# Altium PCB Dev_BRD_STM32F030K6T6.PcbDoc
Units mm, origin at the board's own origin, x right, y up, seen from the top; angles counter-clockwise.
Board outline 27 x 24 mm, 2 copper layers (Top Layer, Bottom Layer); 49 components, 33 nets, 100 pads, 43 vias.
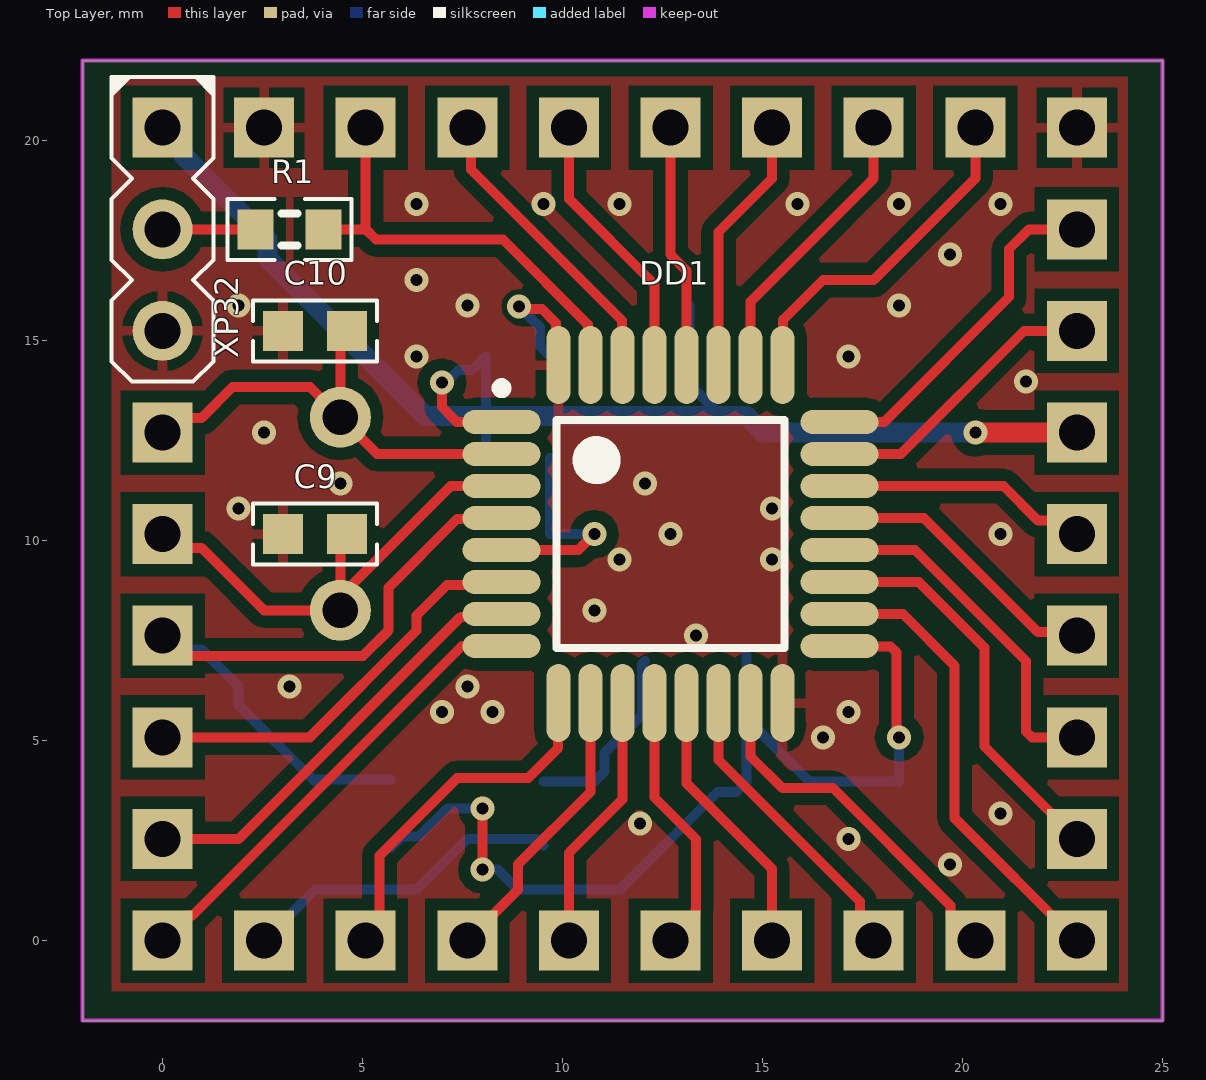
[diagram p0: Top Layer view]
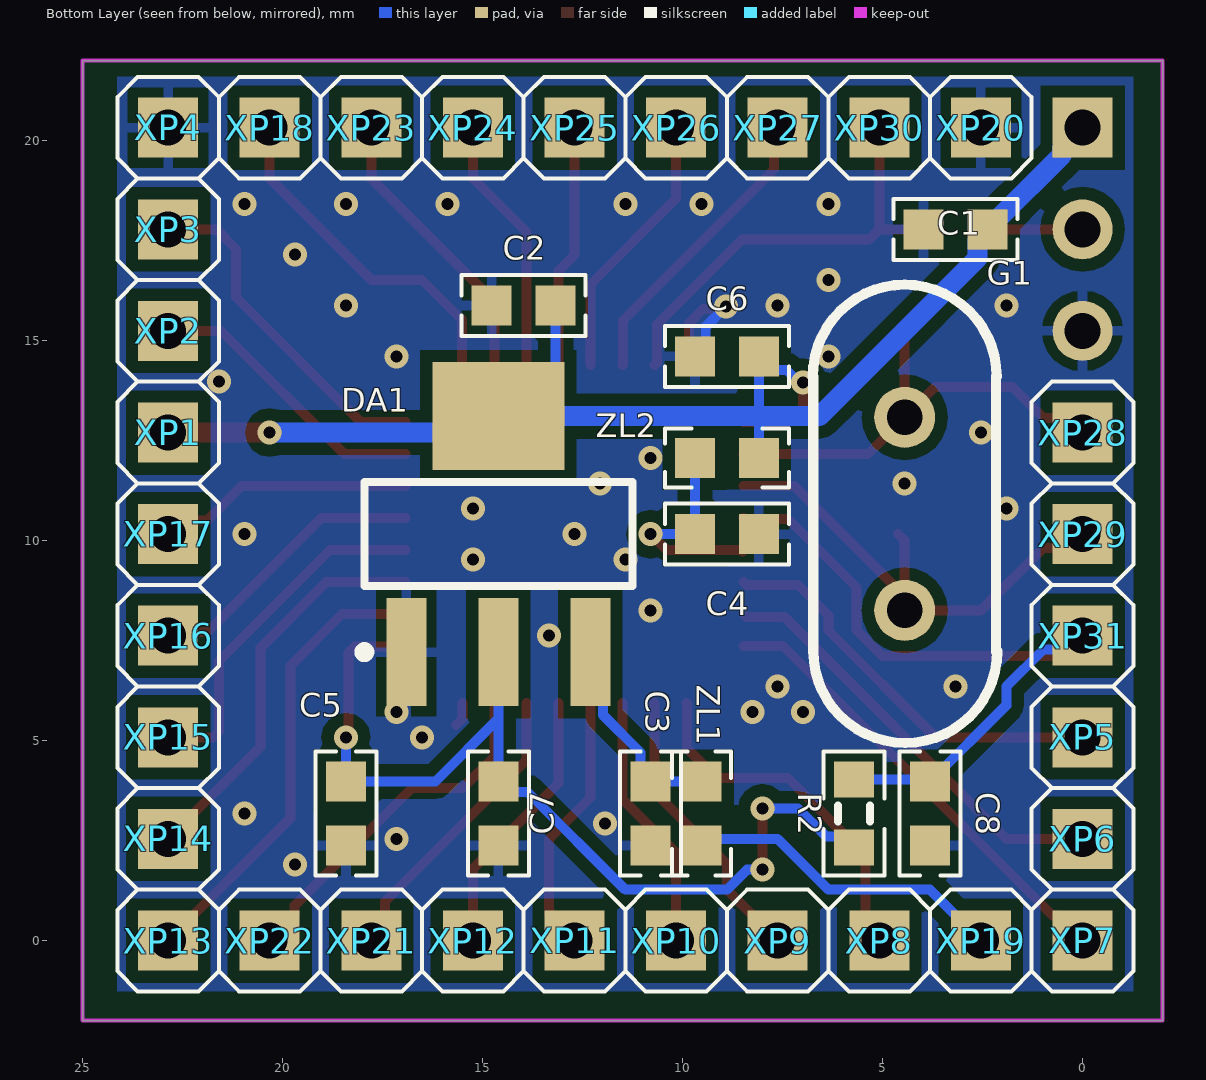
[diagram p1: Bottom Layer view, seen from below]

## Layer stack, top to bottom
Top Solder: solder mask 0.0102, Solder Resist, Dk 3.5
Top Layer: signal copper 0.0356
Dielectric 1: dielectric 0.32, FR-4, Dk 4.8
Bottom Layer: signal copper 0.0356
Bottom Solder: solder mask 0.0102, Solder Resist, Dk 3.5

## Board outline
-2,-2 -2,22 25,22 25,-2

## Design rules (kind name [scope] priority, off if disabled: settings)
Clearance Clearance_1 [InPoly] p1: gap=0.3 ignorepadtopadclearanceinfootprint=TRUE except(0: Arc-Hole Track-Hole SMDPad-Hole THPad-Hole Via-Hole Fill-Hole Poly-Hole Region-Hole Text-Hole)
Clearance [All] p2: gap=0.2 ignorepadtopadclearanceinfootprint=TRUE except(0: Arc-Hole Track-Hole SMDPad-Hole THPad-Hole Via-Hole Fill-Hole Poly-Hole Region-Hole Text-Hole)
PolygonConnect [All] p1: thpad.connectstyle=Relief thpad.reliefconductorwidth=0.254 thpad.reliefentries=4 thpad.polygonreliefangle="90 Angle" thpad.airgapwidth=0.254 smdpad.connectstyle=Relief smdpad.reliefconductorwidth=0.254 smdpad.reliefentries=4 smdpad.polygonreliefangle="90 Angle" smdpad.airgapwidth=0.254 via.connectstyle=Direct via.reliefconductorwidth=0.254 via.reliefentries=4 via.polygonreliefangle="90 Angle" via.airgapwidth=0.254
RoutingVias [All] p1: holewidth=0.5 width=0.8 viastyle="Through Hole" minholewidth=0.3 minwidth=0.6 maxholewidth=0.8 maxwidth=1.2
SolderMaskExpansion [All] p1: expansion=0.102 istentingtop=FALSE
Width [All] p1: maxlimit=0.5 minlimit=0.15 preferedwidth=0.25
30 further rules are at their usual default settings.

## Components (designator, comment, footprint, x,y, rotation, side; value= is the part's Value field where it differs from the comment)
C1 "100n" CAPC1608(0603)N 3.175,17.78 r0 bottom
C2 "10u" CAPC1608(0603)N 13.97,15.875 r180 bottom
C3 "10u" CAPC1608(0603)N 10.795,3.175 r90 bottom
C4 "100n" CAPC1608(0603)N 8.89,10.16 r0 bottom
C5 "100n" CAPC1608(0603)N 18.415,3.175 r90 bottom
C6 "100n" CAPC1608(0603)N 8.89,14.605 r180 bottom
C7 "10u" CAPC1608(0603)N 14.605,3.175 r90 bottom
C8 "100n" CAPC1608(0603)N 3.81,3.175 r90 bottom
C9 "12p" CAPC1608(0603)N 3.81,10.16 r0 top
C10 "12p" CAPC1608(0603)N 3.81,15.24 r0 top
DA1 "LD1117S33T" SOT223_M 14.605,10.16 r90 bottom
DD1 "STM32F030K6T6" STM-LQFP32_M 12.7,10.16 r0 top
G1 "8MHz" HC-49/S 4.445,8.255 r90 bottom
R1 "100k" RESC1608(0603)N 3.175,17.78 r180 top
R2 "10k" RESC1608(0603)N 5.715,3.175 r270 bottom
XP1 "PLS-1" PLS-1-3D 22.86,12.7 r90 bottom
XP2 "PLS-1" PLS-1-3D 22.86,15.24 r90 bottom
XP3 "PLS-1" PLS-1-3D 22.86,17.78 r90 bottom
XP4 "PLS-1" PLS-1-3D 22.86,20.32 r90 bottom
XP5 "PLS-1" PLS-1-3D 0,5.08 r180 bottom
XP6 "PLS-1" PLS-1-3D 0,2.54 r180 bottom
XP7 "PLS-1" PLS-1-3D 0,0 r180 bottom
XP8 "PLS-1" PLS-1-3D 5.08,0 r180 bottom
XP9 "PLS-1" PLS-1-3D 7.62,0 r180 bottom
XP10 "PLS-1" PLS-1-3D 10.16,0 r180 bottom
XP11 "PLS-1" PLS-1-3D 12.7,0 r180 bottom
XP12 "PLS-1" PLS-1-3D 15.24,0 r180 bottom
XP13 "PLS-1" PLS-1-3D 22.86,0 r180 bottom
XP14 "PLS-1" PLS-1-3D 22.86,2.54 r180 bottom
XP15 "PLS-1" PLS-1-3D 22.86,5.08 r180 bottom
XP16 "PLS-1" PLS-1-3D 22.86,7.62 r180 bottom
XP17 "PLS-1" PLS-1-3D 22.86,10.16 r180 bottom
XP18 "PLS-1" PLS-1-3D 20.32,20.32 r180 bottom
XP19 "PLS-1" PLS-1-3D 2.54,0 r90 bottom
XP20 "PLS-1" PLS-1-3D 2.54,20.32 r180 bottom
XP21 "PLS-1" PLS-1-3D 17.78,0 r180 bottom
XP22 "PLS-1" PLS-1-3D 20.32,0 r180 bottom
XP23 "PLS-1" PLS-1-3D 17.78,20.32 r180 bottom
XP24 "PLS-1" PLS-1-3D 15.24,20.32 r180 bottom
XP25 "PLS-1" PLS-1-3D 12.7,20.32 r180 bottom
XP26 "PLS-1" PLS-1-3D 10.16,20.32 r90 bottom
XP27 "PLS-1" PLS-1-3D 7.62,20.32 r180 bottom
XP28 "PLS-1" PLS-1-3D 0,12.7 r90 bottom
XP29 "PLS-1" PLS-1-3D 0,10.16 r90 bottom
XP30 "PLS-1" PLS-1-3D 5.08,20.32 r90 bottom
XP31 "PLS-1" PLS-1-3D 0,7.62 r90 bottom
XP32 "PLS-3" PLS-3-3D 0,20.32 r270 top
ZL1 "100u" INDC1608(0603)N 9.525,3.175 r90 bottom
ZL2 "100u" INDC1608(0603)N 8.89,12.065 r0 bottom

## Footprints (in the part's own frame and the unit in brackets; to place one, negate y for a bottom-side part, rotate by r counter-clockwise, add the part's x,y. Pads: shape width x height; smd on the part's side, far side on the other; paste and mask are expansions set on the pad)
CAPC1608(0603)N [mm] "Chip Capacitor, Body 1.6x0.8mm, IPC Medium Density"
  rect 1x1 smd: 1(-0.8,0) 2(0.8,0)
  silkscreen extent -1.55,-0.76 1.55,0.76, body extent -0.8,-0.4 0.8,0.4, height 0.3
HC-49/S [mil]
  round 60 hole 35: 1(0,0) 2(190,0)
  silkscreen extent -131,-91 321,91, body extent -128,-92 318,92, height 142
INDC1608(0603)N [mm] "Chip Inductor, Body 1.6x0.8mm, IPC Medium Density"
  rect 1x1 smd: 1(-0.8,0) 2(0.8,0)
  silkscreen extent -1.55,-0.74 1.55,0.74, body extent -0.87,-0.48 0.87,0.48, height 0.71
PLS-1-3D [mm] "Connector; Header; 1 Position"
  rect 1.5x1.5 hole 0.9: 1(0,0)
  silkscreen extent -1.27,-1.27 1.27,1.27, body extent -1.27,-1.27 1.27,1.27, height 8.44
PLS-3-3D [mm] "Connector; Header; 3 Position"
  rect 1.5x1.5 hole 0.9: 1(0,0)
  round 1.5 hole 0.9: 2(2.54,0) 3(5.08,0)
  silkscreen extent -1.27,-1.27 6.35,1.27, body extent -1.27,-1.27 6.35,1.27, height 8.44
RESC1608(0603)N [mm] "Chip Resistor, Body 1.6x0.8mm, IPC Medium Density"
  rect 0.9x1 smd: 1(-0.85,0) 2(0.85,0)
  silkscreen extent -1.55,-0.76 1.55,0.76, body extent -0.8,-0.4 0.8,0.4, height 0.3
SOT223_M [mm] "SOT223, 4-Leads, Body 6.5x3.5mm, Pitch 2.3mm, Lead Span 7mm, IPC Low Density"
  rect 2.7x1 smd: 1(-2.95,2.3) 2(-2.95,0) 3(-2.95,-2.3)
  rect 2.7x3.3 smd: 4(2.95,0)
  silkscreen extent -3.07,-3.35 1.3,3.48, body extent -3.65,-3.35 3.65,3.35, height 1.7
STM-LQFP32_M [mm] "QFP, 32-Leads, Body 7x7mm, Pitch 0.8mm, IPC Low Density"
  oval 1.95x0.6 smd: 1(-4.225,2.8) 2(-4.225,2) 3(-4.225,1.2) 4(-4.225,0.4) 5(-4.225,-0.4) 6(-4.225,-1.2) 7(-4.225,-2) 8(-4.225,-2.8) 17(4.225,-2.8) 18(4.225,-2) 19(4.225,-1.2) 20(4.225,-0.4) 21(4.225,0.4) 22(4.225,1.2) 23(4.225,2) 24(4.225,2.8)
  oval 0.6x1.95 smd: 9(-2.8,-4.225) 10(-2,-4.225) 11(-1.2,-4.225) 12(-0.4,-4.225) 13(0.4,-4.225) 14(1.2,-4.225) 15(2,-4.225) 16(2.8,-4.225) 25(2.8,4.225) 26(2,4.225) 27(1.2,4.225) 28(0.4,4.225) 29(-0.4,4.225) 30(-1.2,4.225) 31(-2,4.225) 32(-2.8,4.225)
  silkscreen extent -4.35,-2.85 2.85,3.77, body extent -3.5,-3.5 3.5,3.5, height 1.6

## Part data
C1 C2 C3 C4 C5 C6 C7 C8 C9 C10: library part CAPC1608(0603), "?", Digi-Key Part Number=?, HelpURL=?, Manufacturer Part Number=?, Note=?, Package=?, Part Number=CAPC1608(0603), Price$=?
DA1: "LDO Voltage Regulators 3.3V 0.8A Positive", Digi-Key Part Number=?, HelpURL=http://www.mouser.com/ds/2/389/CD00000544-310772.pdf, Manufacturer Part Number=?, Note=?, Package=?, Part Number=LD1117S33T, Price$=?
DD1: "ARM Microcontrollers - MCU Entry-level ARM Cortex-M0 Value MCU", I/Os (High Current)=26, Mouser Part Number=511-STM32F030K6T6, Operating Frequency(F) (Processor speed) (MHz)=48, Package=LQFP-32, Supplier Part Number 1=497-14046-ND, Supply Voltage(Vcc) min (V)=2.4, ComponentLink1Description="Manufacturer URL", ComponentLink1URL=http://www.st.com/web/en/home.html, ComponentLink2Description=Datasheet, ComponentLink2URL=http://www.st.com/st-web-ui/static/active/en/resource/technical/document/datasheet/DM00088500.pdf, ComponentLink3Description="Package Specification", ComponentLink3URL=http://www.st.com/st-web-ui/static/active/en/resource/technical/document/datasheet/DM00088500.pdf, Core="ARM Cortex-M0", DatasheetVersion="Rev. 1", FLASH Size (Prog) (kB)=32, HelpURL=https://eu.mouser.com/ProductDetail/STMicroelectronics/STM32F030K6T6?qs=eyrSuY1LhL2nYlb0JDdrAA%3D%3D, Internal RAM Size (kB)=4, Manufacturer Part Number=STM32F030K6T6, Mounting Technology="Surface Mount", PackageDescription="32-Pin Low Profile Quad Flat Package, 7 x 7 mm Body, 0.8 mm Pitch", PackageReference=LQFP32, PackageVersion="Rev. 1, 07/2013", Packing=Tray, Part Number=STM32F030K6T6, PartNumber=STM32F030K6T6, Price$=https://eu.mouser.com/ProductDetail/STMicroelectronics/STM32F030K6T6?qs=eyrSuY1LhL2nYlb0JDdrAA%3D%3D, Supplier 1=Digi-Key, Supplier 2=Newark, Supplier 3=Mouser, Supplier Part Number 2=19X6194, Supplier Part Number 3=511-STM32F030K6T6
G1: library part "Crystal HC-49/S", "Crystal HC-49/S", Part Number="Crystal HC-49/S"
R1 R2: library part RESC1608(0603), Digi-Key Part Number=???, HelpURL=???, Manufacturer Part Number=???, Note=???, Package=???, Part Number=RESC1608(0603), Price$=???
XP1 XP2 XP3 XP4 XP5 XP6 XP7 XP8 XP9 XP10 XP11 XP12 XP13 XP14 XP15 XP16 XP17 XP18 XP19 XP20 XP21 XP22 XP23 XP24 XP25 XP26 XP27 XP28 XP29 XP30 XP31: "CONN HEADER VERT 1POS", Digi-Key Part Number=S1011EC-01-ND, Manufacturer Part Number=PRPC001SAAN-RC, HelpURL=https://www.digikey.com/product-detail/en/sullins-connector-solutions/PRPC001SAAN-RC/S1011EC-01-ND/2775253, Note=???, Part Number=PLS-1, Price$=0.05
XP32: library part PR20203VBNN, "CONN HEADER VERT 3POS 2.54MM", Digi-Key Part Number=1849-1003-ND, Package="Header 3POS 2.54mm", HelpURL=https://www.digikey.com/product-detail/en/metz-connect-usa-inc/PR20203VBNN/1849-1003-ND/7794768, Manufacturer Part Number=PR20203VBNN, Part Number=PR20203VBNN
ZL1 ZL2: library part Ferite1608(0603), "ferite bead", Digi-Key Part Number=???, Manufacturer Part Number=???, Note=???, Package=???, Part Number=Ferite1608(0603), Price$=???

## Via types
v1: diameter 0.6, hole 0.3, Top Layer to Bottom Layer, tented both sides, 43 vias

## Nets (pads, with @x,y where several pads share a name; then routed paths per layer and width w, separated by ;. In a path a pad name is that pad's centre, name@x,y a point inside that pad or via, vN(x,y) a via of type N, cw(c..) or ccw(c..) an arc to the next point about the centre after c; other vN are vias at no path point)
+3.3V: C1.1 C2.2 C5.2 C6.2 C7.2 DA1.2 DA1.4 DD1.1 DD1.17 R2.2 XP1.1 XP32.1 ZL2.1 | length 60.2
  Top Layer w0.25: v1(6.985,13.947) 6.985,13.335 7.353,12.967 8.468,12.967 DD1.1 ; v1(8.001,1.778) v1(8.001,3.302) ; DD1.17 16.932,7.353 18.202,7.353 18.348,7.206 18.348,5.147 v1(18.415,5.08)
  Top Layer w0.5: v1(20.32,12.7) XP1.1
  Bottom Layer w0.25: XP32.1 XP32.1@0.509,19.811 ; C1.1@2.125,18.03 C1.1 ; R2.2 5.995,2.605 6.415,2.605 7.112,3.302 v1(8.001,3.302) ; v1(6.985,13.947) 7.08,13.947 7.399,14.266 7.751,14.266 C6.2 8.09,13.11 ZL2.1 ; v1(8.001,1.778) 8.382,1.778 8.89,1.27 11.43,1.27 13.876,3.716 14.346,3.716 C7.2 14.605,5.544 ; C2.2 13.17,13.91 DA1.4@13.97,13.11 ; DA1.2 14.605,5.544 ; v1(18.415,5.08) C5.2 16.174,3.975 14.605,5.544
  Bottom Layer w0.5: XP32.1@0.509,19.811 0.509,19.646 C1.1@2.125,18.03 ; C1.1 2.625,17.53 2.625,17.06 6.575,13.11 8.09,13.11 13.97,13.11 DA1.4 15.015,12.7 v1(20.32,12.7)
+5V: XP19.1 ZL1.1 | length 8.1
  Bottom Layer w0.25: XP19.1 3.81,1.27 6.35,1.27 7.62,2.54 9.36,2.54 ZL1.1
BOOT0: DD1.31 R1.1 XP30.1 | length 11.2
  Top Layer w0.25: R1.1 5.08,17.78 ; XP30.1 5.08,17.78 ; DD1.31 10.633,14.452 10.633,15.402 8.509,17.526 5.334,17.526 5.08,17.78
GND: C1.2 C2.1 C3.1 C4.1 C5.1 C6.1 C7.1 C8.1 C9.1 C10.1 DA1.1 DD1.16 DD1.32 XP4.1 XP20.1 XP32.3 | length 4.4
  Top Layer w0.25: v1(8.912,15.853) 8.979,15.786 9.487,15.786 9.833,15.44 9.833,14.452 DD1.32 ; DD1.16 15.5,5.547 DD1.16@15.662,5.385
  Bottom Layer w0.25: v1(8.912,15.853) 9.431,15.334 9.431,14.864 C6.1
  other v1: 19.685,1.905 17.145,2.54 11.938,2.921 20.955,3.175 16.51,5.08 6.985,5.715 8.255,5.715 17.145,5.715 3.175,6.35 7.62,6.35 13.335,7.62 10.795,8.255 11.43,9.525 15.24,9.525 12.7,10.16 20.955,10.16 1.905,10.795 15.24,10.795 4.445,11.43 12.065,11.43 10.795,12.065 2.54,12.7 21.59,13.97 6.35,14.605 17.145,14.605 1.905,15.875 7.62,15.875 18.415,15.875 6.35,16.51 19.685,17.145 6.35,18.415 9.525,18.415 11.43,18.415 15.875,18.415 18.415,18.415 20.955,18.415
NetC3_2: C3.2 DA1.3 ZL1.2 | length 4.8
  Bottom Layer w0.25: ZL1.2 C3.2 11.054,4.234 11.054,4.704 11.992,5.642 11.992,6.912 DA1.3@12.065,6.985
NetC4_2: C4.2 DD1.5 ZL2.2 | length 5.5
  Top Layer w0.25: DD1.5@8.505,9.73 DD1.5 10.395,9.76 v1(10.795,10.16)
  Bottom Layer w0.25: ZL2.2 C4.2 v1(10.795,10.16)
NetC9_2: C9.2 DD1.3 G1.1 XP29.1 | length 12.3
  Top Layer w0.25: XP29.1 0.344,9.816 0.979,9.816 2.54,8.255 G1.1 4.445,8.516 G1.1@4.445,8.68 ; C9.2 4.445,9.995 G1.1@4.445,8.68 ; DD1.3 7.205,11.36 4.525,8.68 G1.1@4.445,8.68
NetC10_2: C10.2 DD1.2 G1.2 XP28.1 | length 11.9
  Top Layer w0.25: XP28.1 0.366,13.066 0.979,13.066 1.751,13.838 3.688,13.838 G1.2 ; C10.2 4.445,15.075 G1.2 ; DD1.2 5.366,12.16 G1.2
NetDD1_6: DD1.6 XP5.1 | length 10.3
  Top Layer w0.25: XP5.1 3.683,5.08 6.35,7.747 6.35,8.128 7.112,8.89 7.483,8.89 7.486,8.893 8.408,8.893 DD1.6
NetDD1_7: DD1.7 XP6.1 | length 10.8
  Top Layer w0.25: XP6.1 1.904,2.54 7.457,8.093 8.408,8.093 DD1.7
NetDD1_8: DD1.8 XP7.1 | length 11.5
  Top Layer w0.25: XP7.1 0.625,0.625 0.752,0.625 7.487,7.36 DD1.8
NetDD1_9: DD1.9 XP8.1 | length 9.2
  Top Layer w0.25: XP8.1 5.424,0.344 5.424,2.122 7.366,4.064 9.144,4.064 9.893,4.813 9.893,5.928 DD1.9
  Bottom Layer w0.25: XP8.1@4.934,0 XP8.1@5.08,0.146
NetDD1_10: DD1.10 XP9.1 | length 7.2
  Top Layer w0.25: XP9.1 8.89,1.27 8.89,1.905 10.7,3.715 DD1.10
NetDD1_11: DD1.11 XP10.1 | length 6.5
  Top Layer w0.25: XP10.1 10.16,2.192 11.5,3.532 DD1.11
NetDD1_12: DD1.12 XP11.1 | length 6.6
  Top Layer w0.25: DD1.12 12.3,3.575 13.335,2.54 13.335,0.771 13.325,0.761 13.325,0.625 XP11.1
NetDD1_13: DD1.13 XP12.1 | length 6.8
  Top Layer w0.25: DD1.13 13.1,3.932 15.24,1.792 XP12.1
NetDD1_14: DD1.14 XP21.1 | length 7.5
  Top Layer w0.25: DD1.14 13.9,4.515 15.69,2.725 17.436,0.979 17.436,0.344 XP21.1
NetDD1_15: DD1.15 XP22.1 | length 9
  Top Layer w0.25: DD1.15 14.7,4.604 15.494,3.81 16.764,3.81 19.695,0.879 19.695,0.625 XP22.1
NetDD1_18: DD1.18 XP13.1 | length 11.5
  Top Layer w0.25: DD1.18 18.51,8.16 19.804,6.866 19.804,3.056 XP13.1
NetDD1_19: DD1.19 XP14.1 | length 10
  Top Layer w0.25: DD1.19 18.908,8.96 20.546,7.322 20.546,4.854 XP14.1
NetDD1_20: DD1.20 XP15.1 | length 8.9
  Top Layer w0.25: DD1.20 18.815,9.76 21.59,6.985 21.59,5.226 21.736,5.08 XP15.1
NetDD1_21: DD1.21 XP16.1 | length 7.2
  Top Layer w0.25: DD1.21 19.031,10.56 21.881,7.71 22.77,7.71 XP16.1
NetDD1_22: DD1.22 XP17.1 | length 6.4
  Top Layer w0.25: DD1.22 21.025,11.36 21.881,10.504 22.516,10.504 XP17.1
NetDD1_25: DD1.25 XP18.1 | length 8.7
  Top Layer w0.25: DD1.25 15.507,14.392 15.507,15.507 15.597,15.597 16.51,16.51 17.78,16.51 20.32,19.05 XP18.1
NetDD1_26: DD1.26 XP23.1 | length 7.2
  Top Layer w0.25: DD1.26 14.7,15.97 17.78,19.05 XP23.1
NetDD1_27: DD1.27 XP24.1 | length 6.5
  Top Layer w0.25: DD1.27 13.9,17.71 15.24,19.05 XP24.1
NetDD1_28: DD1.28 XP25.1 | length 6.1
  Top Layer w0.25: XP25.1 12.7,17.145 13.1,16.745 DD1.28
NetDD1_29: DD1.29 XP26.1 | length 6.8
  Top Layer w0.25: XP26.1 10.16,18.542 12.3,16.402 DD1.29
NetDD1_30: DD1.30 XP27.1 | length 7.5
  Top Layer w0.25: XP27.1 7.71,20.23 7.71,19.276 11.485,15.5 11.485,14.4 DD1.30
NetR1_2: R1.2 XP32.2 | length 2.3
  Top Layer w0.25: XP32.2 R1.2
nRST: C8.2 DD1.4 R2.1 XP31.1 | length 18.3
  Top Layer w0.25: XP31.1 0.502,7.118 5.014,7.118 5.653,7.757 5.653,8.828 7.365,10.54 8.455,10.54 DD1.4
  Bottom Layer w0.25: XP31.1 0.344,7.276 0.979,7.276 1.905,6.35 1.905,5.88 C8.2 3.86,4.025 R2.1
SWDCLK: DD1.24 XP3.1 | length 8.6
  Top Layer w0.25: DD1.24 16.932,12.967 18.047,12.967 21.165,16.085 21.165,17.286 21.659,17.78 XP3.1
SWDIO: DD1.23 XP2.1 | length 7.2
  Top Layer w0.25: DD1.23 18.458,12.16 21.538,15.24 XP2.1

## Polygon pours and split planes (outlines as drawn)
no net on Top Layer "NONET_L01_P008" (solid, remove dead copper, pour order 8): 19.05,24.13
GND on Top Layer "GND_L01_P005" (solid, remove dead copper, pour order 5): -1.27,21.59 24.13,21.59 24.13,-1.27 -1.27,-1.27
GND on Bottom Layer "GND_L02_P004" (solid, remove dead copper, pour order 4): -1.27,21.59 24.13,21.59 24.13,-1.27 -1.27,-1.27

## Keep-outs
Keep-Out Layer:
  the board outline again, w0.1

## Dimensions
25,22 to 25,-2 on Dimensions
-2,22 to 25,22 on Dimensions